# Altium PCB IO_Combo_V1_2PCB.PcbDoc (part 3 of 3)
Units mil, origin at the board's own origin, x right, y up, seen from the top; angles counter-clockwise.
Board outline 5600 x 4000 mil, 4 copper layers (Top Layer, Plane_Gnd, Plane_Power, Bottom Layer), stack 23.756 mil thick; 126 components, 208 nets, 710 pads, 196 vias.
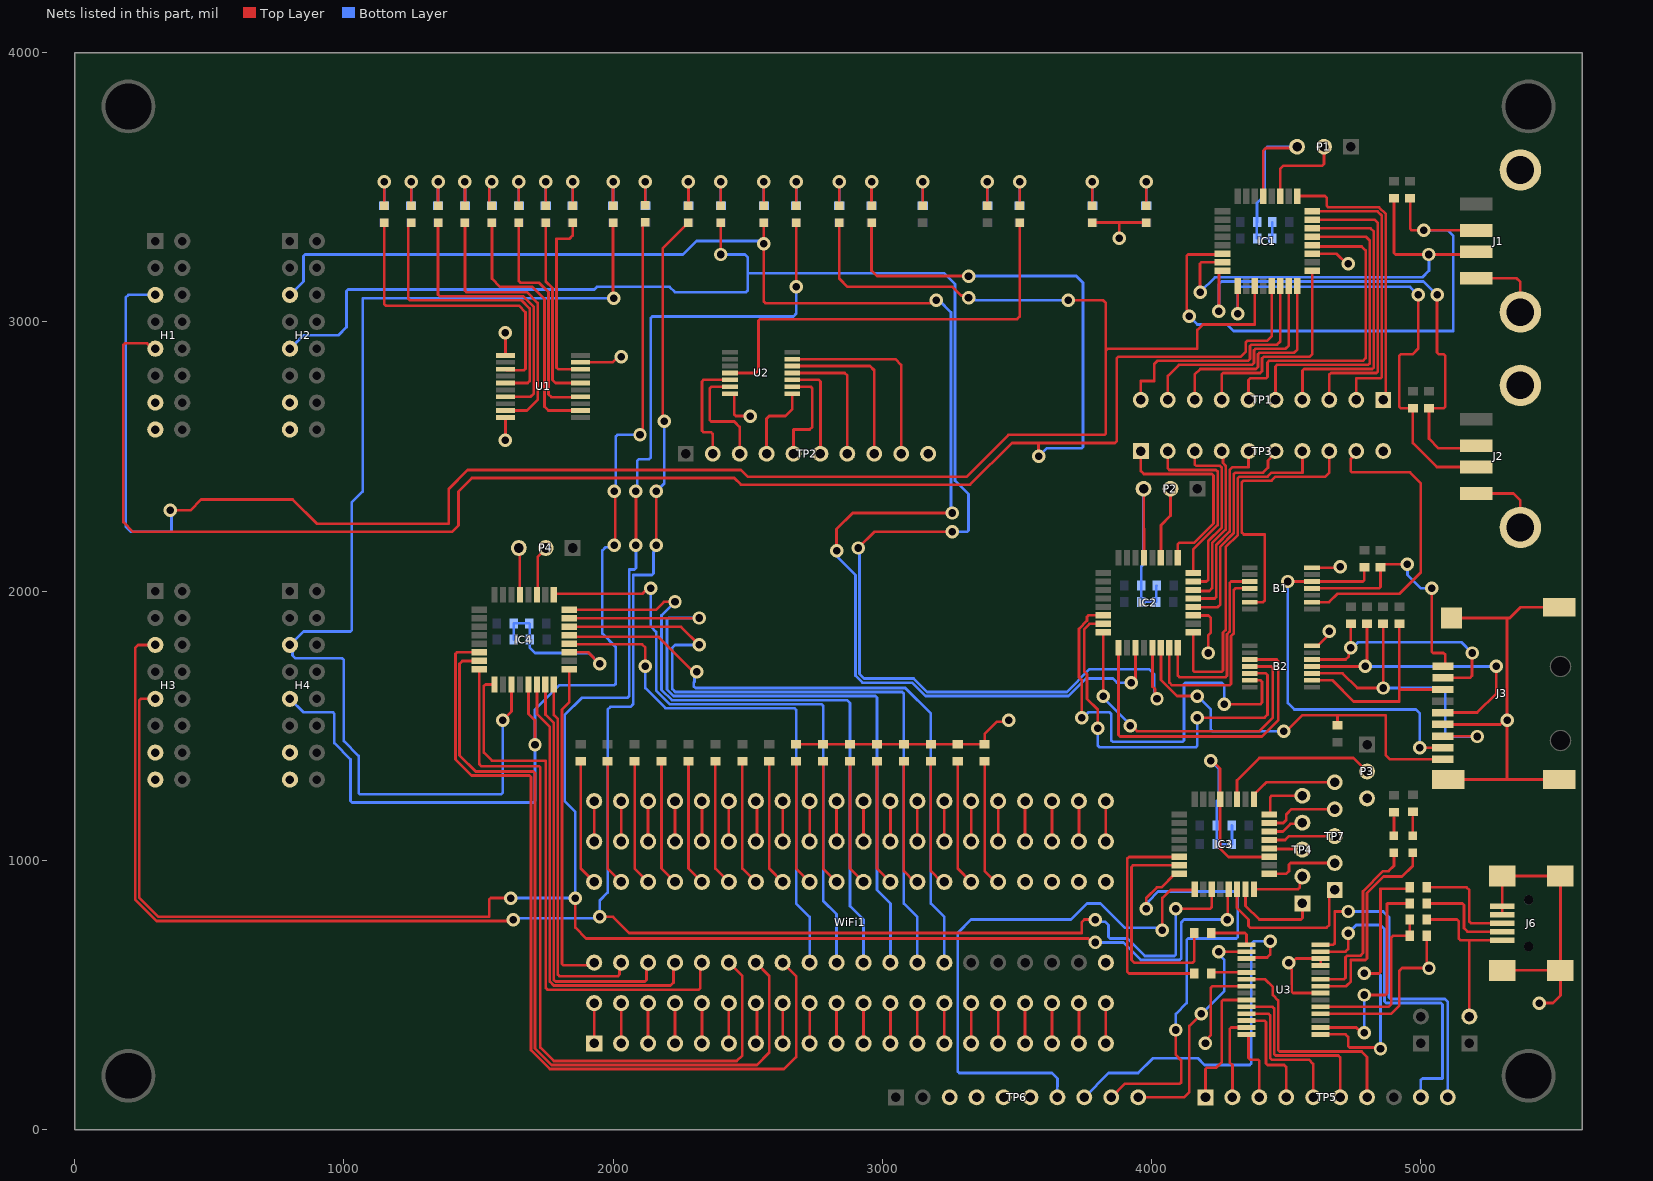
[diagram p4: the nets of this part, all layers, seen from the top]

## Via types
v1: diameter 50, hole 28, Top Layer to Bottom Layer, 196 vias

## Nets (pads, with @x,y where several pads share a name; then routed paths per layer and width w, separated by ;. In a path a pad name is that pad's centre, name@x,y a point inside that pad or via, vN(x,y) a via of type N, cw(c..) or ccw(c..) an arc to the next point about the centre after c; other vN are vias at no path point) (continued)
GND: B1.7 B2.7 C1.2 C2.2 C3.2 C4.2 C5.2 C6.2 C7.2 C8.2 C9.2 C10.2 C11.2 C12.2 C13.2 C14.2 C15.2 C16.2 H1.13 H1.15 H2.13 H2.15 H3.13 H3.15 H4.13 H4.15 IC1.19 IC1.29 IC2.19 IC2.29 IC3.19 IC3.29 IC4.19 IC4.29 J1.4 J1.MH1 J1.MH4 J2.4 J2.MH1 J2.MH4 J3.6 J3.MP1 J3.MP2 J3.MP3 J3.MP4 J6.4 J6.5 J6.6 J6.7 J6.8 J6.9 LED10.1 LED11.1 P1.3 P2.3 P3.3 P4.3 R40.1 R49.2 R50.2 R51.2 R52.2 R53.2 R54.2 R55.2 R56.2 TP2.10 TP3.10 TP6.3 TP6.4 TP6.5 TP6.6 U1.1 U1.10 U1.19 U2.7 U3.7 U3.18 U3.21 U3.25 U3.26 WiFi1.61 WiFi1.81 WiFi1.82 WiFi1.83 WiFi1.84 | length 10429.7
  Top Layer w10: v1(1600,2560) 1600.24,2560.24 U1.10@1600.24,2644.84 ; v1(1600,2960) 1600.24,2959.76 U1.1@1600.24,2875.16 ; P4.3@1653.13,2153.2 1653.13,1987.97 IC4.29@1654.25,1986.85 ; IC4.19@1836.85,1772.76 1907.24,1772.76 v1(1950,1730) ; U1.19@1879.76,2849.57 1880.2,2850 1999.18,2850 2019.18,2870 v1(2030,2870) ; U2.7@2434.33,2733.23 2446.14,2733.23 2450,2729.37 2450,2655.86 2455.86,2650 v1(2510,2650) ; R56.2@2680,1431.5 R55.2@2780,1431.5 R54.2@2880,1431.5 R53.2@2980,1431.5 R52.2@3080,1431.5 R51.2@3180,1431.5 R50.2@3280,1431.5 R49.2@3380,1431.5 3380,1470 3425,1515 3465,1515 v1(3470,1520) ; LED11.1@3780,3368.5 3880,3368.5 ; v1(3880,3310) 3880,3368.5 ; P2.3@3970,2380 3970.75,2379.25 3970.75,2124.45 IC2.29@3971.5,2123.7 3971.5,2231.5 ; LED10.1@3980,3368.5 3880,3368.5 ; IC2.19@4154.09,1909.61 4210.39,1909.61 4220,1900 4220,1845.41 4210,1835.41 v1(4210,1770) ; v1(4200,320) 4200,330.82 4220,350.82 4220,526.94 4225.86,532.8 U3.7@4352.2,532.8 ; v1(4220,1370) 4224.86,1370 4254.25,1340.61 IC3.29@4254.25,1236.85 ; IC3.29@4250,1236.85 IC3.29@4257.13,1229.72 ; IC3.29@4254.25,1226.85 4254.25,1044.25 4254.14,1044.14 4285.53,1012.76 IC3.19@4436.85,1012.76 ; IC1.29@4414.25,3466.85 4414.25,3634.25 4425.59,3645.59 4524.24,3645.59 P1.3@4528.65,3650 ; B2.7@4595.67,1796.77 4615.85,1796.77 4660,1840.93 v1(4660,1850) ; B1.7@4595.67,2086.77 4696.77,2086.77 v1(4700,2090) ; IC1.19@4596.85,3252.76 4687.24,3252.76 4725,3215 v1(4730,3215) ; U3.18@4627.8,430.43 4890,430.43 4920,460.43 4920,590 4929.96,599.96 v1(5030.04,599.96) 5021.5,608.5 R40.1@5021.5,720 ; U3.21@4627.8,507.2 4525.86,507.2 4520,513.06 4520,594.14 4517.65,596.49 4517.65,612.35 v1(4510,620) 4520.82,620 4535.98,635.16 U3.26@4627.8,635.16 U3.25@4627.8,609.57 ; J3.6@5081.52,1504.7 5294.14,1504.7 5301.66,1512.21 5317.79,1512.21 v1@5320,1510 ; J3.MP2@5101.2,1300 5320,1300 ; J3.MP1@5113.48,1900 5320,1900 ; J2.4@5205,2362.2 5344.14,2362.2 5369.29,2337.06 J2.MH4@5369.29,2236.22 ; J1.4@5205,3162.2 5354.14,3162.2 5369.29,3147.06 J1.MH4@5369.29,3036.22 ; J6.9@5301.57,591.42 J6.8@5518.11,591.42 ; J6.4@5301.57,798.11 J6.5@5301.57,829.61 J6.6@5301.57,941.81 J6.7@5518.11,941.81 J6.8@5518.11,591.42 ; v1(5440,470) 5490,470 5518.11,498.11 J6.8@5518.11,591.42 ; J3.MP4@5513.48,1300 5320,1300 ; J3.MP3@5513.48,1940 5370,1940 5330,1900 5320,1900 ; 5320,1300 v1@5320,1510 ; v1@5320,1510 5320,1900
  Bottom Layer w10: C13.2@1631.5,1820 C15.2@1631.5,1880 C16.2@1688.5,1880 1690,1878.5 1690,1790 1710,1770 1910,1770 v1(1950,1730) ; P2.3@3970,2380 3970,2100 3961.5,2091.5 C8.2@3961.5,2020 C5.2@3961.5,1960 C7.2@4017.01,1960 4017.01,2018.5 C6.2@4018.5,2020 ; v1(4220,1370) 4250,1340 4250,1228.5 4241.5,1220 C12.2@4241.5,1130 C9.2@4241.5,1060 C10.2@4298.5,1060 4298.5,1128.5 C11.2@4297.01,1130 ; C1.2@4390,3370 4390,3311.5 C4.2@4391.5,3310 C2.2@4448.5,3310 C3.2@4448.5,3370 ; C1.2@4391.5,3370 4391.5,3441.5 4420,3470 4420,3640 4430,3650 P1.3@4540,3650
  other v1: 5320,1520
Key_Clock: IC1.9 J2.3 R4.2 | length 1806.6
  Top Layer w10: IC1.9@4319.76,3133.15 4319.88,3133.03 4319.88,3030.12 v1(4320,3030) ; v1(4990,3100) 4990,2900 4970,2880 4925.86,2880 4920,2874.14 4920,2684.36 4925.86,2678.5 R4.2@4970,2678.5 4970,2550 5059.37,2460.63 J2.3@5205,2460.63 J2.3@5205.63,2460
  Bottom Layer w10: v1(4320,3030) 4320,3124.14 4325.86,3130 4960,3130 v1(4990,3100)
Key_Data: IC1.8 J2.2 R3.2 | length 1914.6
  Top Layer w10: v1(4250,3040) 4250,3182.95 4256.81,3189.76 IC1.8@4263.15,3189.76 ; v1(5060,3100) 5060,2885.86 5065.86,2880 5084.14,2880 5090,2874.14 5090,2684.36 5084.14,2678.5 R3.2@5030,2678.5 5030,2565.86 5065.86,2530 5195.63,2530 J2.2@5205,2539.37 J2.2@5214.37,2530
  Bottom Layer w10: v1(4250,3040) 4250,3140 4260,3150 5010,3150 v1(5060,3100)
KM_CPU_CS: H1.9 IC1.13 LED6.1 | length 7671.5
  Top Layer w10: H1.9@300,2900 289.14,2900 269.14,2920 187.23,2920 181.37,2914.14 181.37,2255.86 217.23,2220 1402.43,2220 1425.61,2243.18 1425.61,2370 1475.61,2420 2450,2420 2475,2395 3326.21,2395 3481.21,2550 3580,2550 ; LED6.1@2960,3368.5 2960,3190 2980,3170 v1(3320,3170) ; v1(3580,2500) 3580,2550 ; IC1.13@4445.75,3133.15 4445.75,2945.86 4429.89,2930 4355.86,2930 4350,2924.14 4350,2890 4330,2870 3875.86,2870 3870,2864.14 3870,2555.86 3864.14,2550 3580,2550
  Bottom Layer w10: v1(3320,3170) 3720,3170 3745,3145 3745,2535.86 3739.14,2530 3610,2530 v1(3580,2500)
KM_CPU_nInt: H1.5 IC1.11 LED4.1 | length 7482.4
  Top Layer w10: v1(355,2300) 430,2300 470,2340 810,2340 900,2250 1390,2250 1390,2380 1460,2450 2475,2450 2500,2425 3313.79,2425 3468.79,2580 3824.14,2580 3830,2585.86 3830,2894.14 ; LED4.1@2840,3368.5 2840,3160 2870,3130 3260,3130 3292.35,3097.65 3312.35,3097.65 v1(3320,3090) ; v1(3690,3080) 3820,3080 3830,3070 3830,2894.14 ; IC1.11@4382.76,3133.15 4382.76,2990 4190,2990 4170,2970 4170,2900 3835.86,2900 3830,2894.14
  Bottom Layer w10: H1.5@300,3100 200,3100 190,3090 190,2240 210,2220 354.14,2220 360,2225.86 360,2295 v1(355,2300) ; v1(3320,3090) 3327.65,3082.35 3343.51,3082.35 3345.86,3080 v1(3690,3080)
Mouse_Clock: IC1.7 J1.3 R2.2 | length 1648.6
  Top Layer w10: v1(4180,3110) 4180,3215.4 4185.86,3221.26 IC1.7@4263.15,3221.26 ; R2.2@4900,3458.5 4900,3255.86 4905.86,3250 5194.37,3250 J1.3@5205,3260.63
  Bottom Layer w10: v1(4180,3110) 4235,3165 5005,3165 5030,3190 v1(5030,3250)
Mouse_Data: IC1.6 J1.2 R1.2 | length 2201.1
  Top Layer w10: v1(4140,3020) 4132.35,3027.65 4132.35,3043.51 4130,3045.86 4130,3244.14 4135.86,3250 4260.39,3250 IC1.6@4263.15,3252.76 ; R1.2@4960,3458.5 4960,3345.86 4965.86,3340 v1(5010,3340) 5204.37,3340 J1.2@5205,3339.37 J1.2@5205.63,3340
  Bottom Layer w10: v1(4140,3020) 4170,2990 4280,2990 4304.14,2965.86 5120,2965.86 5120,3320 5100,3340 v1(5010,3340)
NetB1_4: B1.4 J3.1 R27.2 | length 910.2
  Top Layer w10: B1.4@4595.67,2010 4844.14,2010 4850,2015.86 R27.2@4850,2088.5 4860.75,2099.25 4949.25,2099.25 v1(4950,2100) ; v1@5040,2000 5040,1775.86 5045.86,1770 5084.14,1770 5090,1764.14 5090,1729.42 J3.1@5081.81,1721.24
  Bottom Layer w10: v1(4950,2100) 4950,2060 5000,2010 v1(5040,2010)
NetB1_5: B1.5 J3.8 R26.2 | length 1512.7
  Top Layer w10: v1(4505.86,2035.59) B1.5@4595.67,2035.59 4784.14,2035.59 4790,2041.45 R26.2@4790,2088.5 ; v1@4990,1423.94 v1(4995.86,1418.08) J3.8@5081.52,1418.08
  Bottom Layer w10: v1(4505.86,2035.59) 4505.86,1584.14 4530,1560 4981.72,1560 4995.86,1545.86 v1(4995.86,1418.08)
NetB2_2: B2.2 J3.3 R28.2 | length 809.4
  Top Layer w10: B2.2@4595.67,1668.82 4671.18,1668.82 4750,1590 4920,1590 4920,1640.48 ; R28.2@4920,1878.5 4920,1640.48 ; J3.3@5081.52,1634.62 4925.86,1634.62 4920,1640.48
NetB2_3: B2.3 J3.7 R29.2 | length 1177.6
  Top Layer w10: B2.3@4595.67,1694.41 4709.47,1694.41 4763.88,1640 v1(4860,1640) R29.2@4860,1878.5 ; J3.7@5081.52,1461.39 5082.21,1460.69 5209.31,1460.69 v1(5210,1460)
  Bottom Layer w10: v1(4860,1640) 5084.14,1640 5090,1634.14 5090,1465.86 5095.86,1460 v1(5210,1460)
NetB2_4: B2.4 J3.5 R30.2 | length 1173.6
  Top Layer w10: B2.4@4595.67,1720 v1(4794.14,1720) 4800,1725.86 R30.2@4800,1878.5 ; J3.5@5081.52,1548 5082.51,1549 5209,1549 5280,1620 v1(5280,1720)
  Bottom Layer w10: v1(4794.14,1720) v1(5280,1720)
NetB2_5: B2.5 J3.2 R31.2 | length 936.4
  Top Layer w10: B2.5@4595.67,1745.59 4720.77,1745.59 4732.35,1757.17 4732.35,1782.35 v1(4740,1790) R31.2@4740,1878.5 ; J3.2@5081.81,1677.93 5182.07,1677.93 5190,1685.86 v1(5190,1770)
  Bottom Layer w10: v1(4740,1790) 4745.86,1790 4765.86,1810 5150,1810 v1(5190,1770)
NetJ5_2: J5.2 J6.1 R37.2 | length 632.9
  Top Layer w10: R37.2@5021.5,780 5134.14,780 5140,774.14 5140,710 5146.38,703.62 5180,703.62 ; J5.2@5180,420 5180,703.62 ; J6.1@5301.57,703.62 5180,703.62
NetLED1_2: LED1.2 R5.1 | length 177
  Top Layer w10: LED1.2@2000,3431.5 v1(2000,3520)
  Bottom Layer w10: R5.1@2000,3431.5 v1(2000,3520)
NetLED2_2: LED2.2 R6.1 | length 177
  Top Layer w10: LED2.2@2280,3431.5 v1(2280,3520)
  Bottom Layer w10: R6.1@2280,3431.5 v1(2280,3520)
NetLED3_2: LED3.2 R7.1 | length 177
  Top Layer w10: LED3.2@2560,3431.5 v1(2560,3520)
  Bottom Layer w10: R7.1@2560,3431.5 v1(2560,3520)
NetLED4_2: LED4.2 R8.1 | length 177
  Top Layer w10: LED4.2@2840,3431.5 v1(2840,3520)
  Bottom Layer w10: R8.1@2840,3431.5 v1(2840,3520)
NetLED5_2: LED5.2 R9.1 | length 177
  Top Layer w10: LED5.2@3150,3431.5 v1(3150,3520)
  Bottom Layer w10: R9.1@3150,3431.5 v1(3150,3520)
NetLED6_2: LED6.2 R10.1 | length 177
  Top Layer w10: LED6.2@2960,3431.5 v1(2960,3520)
  Bottom Layer w10: R10.1@2960,3431.5 v1(2960,3520)
NetLED7_2: LED7.2 R11.1 | length 175.5
  Top Layer w10: LED7.2@2120,3432.99 v1(2120,3520)
  Bottom Layer w10: R11.1@2120,3431.5 v1(2120,3520)
NetLED8_2: LED8.2 R12.1 | length 177
  Top Layer w10: LED8.2@2680,3431.5 v1(2680,3520)
  Bottom Layer w10: R12.1@2680,3431.5 v1(2680,3520)
NetLED9_2: LED9.2 R13.1 | length 177
  Top Layer w10: LED9.2@2400,3431.5 v1(2400,3520)
  Bottom Layer w10: R13.1@2400,3431.5 v1(2400,3520)
NetLED10_2: LED10.2 R14.1 | length 177
  Top Layer w10: LED10.2@3980,3431.5 v1(3980,3520)
  Bottom Layer w10: R14.1@3980,3431.5 v1(3980,3520)
NetLED11_2: LED11.2 R15.1 | length 177
  Top Layer w10: LED11.2@3780,3431.5 v1(3780,3520)
  Bottom Layer w10: R15.1@3780,3431.5 v1(3780,3520)
NetLED12_1: LED12.1 U1.18 | length 684.1
  Top Layer w10: LED12.1@1850,3368.5 1850,3320 1838.5,3308.5 1790,3308.5 1790,2829.83 1795.86,2823.98 U1.18@1879.76,2823.98
NetLED12_2: LED12.2 R16.1 | length 157
  Top Layer w10: LED12.2@1850,3431.5 v1@1850,3510
  Bottom Layer w10: R16.1@1850,3431.5 v1@1850,3510
  other v1: 1850,3520
NetLED13_1: LED13.1 U1.16 | length 704.5
  Top Layer w10: LED13.1@1750,3368.5 1750,3150 1775,3125 1775,2783.65 1785.86,2772.8 U1.16@1879.76,2772.8
NetLED13_2: LED13.2 R17.1 | length 177
  Top Layer w10: LED13.2@1750,3431.5 v1(1750,3520)
  Bottom Layer w10: R17.1@1750,3431.5 v1(1750,3520)
NetLED14_1: LED14.1 U1.14 | length 848.6
  Top Layer w10: LED14.1@1650,3368.5 1650,3150.86 1655.86,3145 1725,3145 1760,3110 1760,2730.86 1770.86,2720 1878.15,2720 U1.14@1879.76,2721.61
NetLED14_2: LED14.2 R18.1 | length 177
  Top Layer w10: LED14.2@1650,3431.5 v1(1650,3520)
  Bottom Layer w10: R18.1@1650,3431.5 v1(1650,3520)
NetLED15_1: LED15.1 U1.12 | length 975.4
  Top Layer w10: LED15.1@1550,3368.5 1550,3160 1580,3130 1700,3130 1745,3085 1745,2685 1759.57,2670.43 U1.12@1879.76,2670.43
NetLED15_2: LED15.2 R19.1 | length 185.3
  Top Layer w10: v1@1540,3520 1540,3441.5 LED15.2@1550,3431.5
  Bottom Layer w10: v1@1540,3520 1540,3441.5 R19.1@1550,3431.5
  other v1: 1550,3520
NetLED16_1: LED16.1 U1.9 | length 1037.8
  Top Layer w10: LED16.1@1450,3368.5 1450,3115.86 1455.86,3110 1680,3110 1720,3070 1720,2710 1680.43,2670.43 U1.9@1600.24,2670.43
NetLED16_2: LED16.2 R20.1 | length 177
  Top Layer w10: LED16.2@1450,3431.5 v1(1450,3520)
  Bottom Layer w10: R20.1@1450,3431.5 v1(1450,3520)
NetLED17_1: LED17.1 U1.7 | length 1074.1
  Top Layer w10: LED17.1@1350,3368.5 1350,3100.86 1355.86,3095 1666.21,3095 1705,3056.21 1705,2732.47 1694.14,2721.61 U1.7@1600.24,2721.61
NetLED17_2: LED17.2 R21.1 | length 177
  Top Layer w10: LED17.2@1350,3431.5 v1(1350,3520)
  Bottom Layer w10: R21.1@1350,3431.5 v1(1350,3520)
NetLED18_1: LED18.1 U1.5 | length 1115.4
  Top Layer w10: LED18.1@1250,3368.5 1239.25,3357.76 1239.25,3085.86 1245.11,3080 1660,3080 1690,3050 1690,2780 1682.8,2772.8 U1.5@1600.24,2772.8
NetLED18_2: LED18.2 R22.1 | length 177
  Top Layer w10: LED18.2@1250,3431.5 v1(1250,3520)
  Bottom Layer w10: R22.1@1250,3431.5 v1(1250,3520)
NetLED19_1: LED19.1 U1.3 | length 1128.4
  Top Layer w10: LED19.1@1150,3368.5 1150,3065.86 1155.86,3060 1650,3060 1675,3035 1675,2825.86 1669.14,2820 1650.79,2820 1650.67,2820.12 1604.09,2820.12 U1.3@1600.24,2823.98
NetLED19_2: LED19.2 R23.1 | length 177
  Top Layer w10: LED19.2@1150,3431.5 v1(1150,3520)
  Bottom Layer w10: R23.1@1150,3431.5 v1(1150,3520)
NetLED20_2: LED20.2 R24.1 | length 177
  Top Layer w10: LED20.2@3390,3431.5 v1(3390,3520)
  Bottom Layer w10: R24.1@3390,3431.5 v1(3390,3520)
NetLED21_1: LED21.1 U2.4 | length 1619
  Top Layer w10: U2.4@2434.33,2810 2530,2810 2540,2820 2540,3004.14 2545.86,3010 3500,3010 3510,3020 LED21.1@3510,3368.5
NetLED21_2: LED21.2 R25.1 | length 177
  Top Layer w10: LED21.2@3510,3431.5 v1(3510,3520)
  Bottom Layer w10: R25.1@3510,3431.5 v1(3510,3520)
NetLED22_1: LED22.1 U3.23 | length 673.9
  Top Layer w10: U3.23@4627.8,558.39 4714.14,558.39 4720,564.24 4720,639.89 4725.86,645.75 4774.89,645.75 4785,655.86 4785,885 4860,960 4880,960 4900,980 LED22.1@4900,1028.5
NetLED22_2: LED22.2 R33.1 | length 67
  Top Layer w10: LED22.2@4900,1091.5 4900,1158.5
NetLED23_1: LED23.1 U3.22 | length 765.1
  Top Layer w10: U3.22@4627.8,532.8 4722.8,532.8 4740,550 4740,630 4794.14,630 4800,635.86 4800,878.79 4861.21,940 4930,940 4970,980 LED23.1@4970,1028.5
NetLED23_2: LED23.2 R34.1 | length 68.5
  Top Layer w10: LED23.2@4970,1091.5 4970,1160
NetR35_2: R35.2 U3.1 | length 170.9
  Top Layer w10: R35.2@4221.5,730 4346.35,730 4352.2,724.14 U3.1@4352.2,686.34
NetR36_2: R36.2 U3.5 | length 133.2
  Top Layer w10: R36.2@4221.5,590 4227.52,583.98 U3.5@4352.2,583.98
NetR37_1: R37.1 R40.2 U3.19 | length 645.5
  Top Layer w10: U3.19@4627.8,456.02 4880.17,456.02 4890,465.86 4890,714.14 4895.86,720 R40.2@4958.5,720 R37.1@4958.5,780
NetR38_2: R38.2 U3.16 | length 814.2
  Top Layer w10: U3.16@4627.8,379.25 4759.92,379.25 4779.18,360 v1(4790,360) ; v1(4790,500) 4868.28,500 4874.14,505.86 4874.14,838.28 4875.86,840 R38.2@4958.5,840
  Bottom Layer w10: v1(4790,360) v1(4790,500)
NetR39_2: R39.2 U3.15 | length 1082.1
  Top Layer w10: U3.15@4627.8,353.66 4720.48,353.66 4730,344.14 4730,310.86 4735.86,305 4845,305 v1(4850,300) ; v1(4790,580) 4844.14,580 4850,585.86 4850,894.14 4952.65,894.14 R39.2@4958.5,900
  Bottom Layer w10: v1(4790,580) 4844.14,580 4850,574.14 v1(4850,300)
NetR41_2: R41.2 WiFi1.100 | length 469.2
  Top Layer w10: R41.2@1880,1368.5 1880,970 WiFi1.100@1930,920
NetR42_2: R42.2 WiFi1.99 | length 469.2
  Top Layer w10: R42.2@1980,1368.5 1980,970 WiFi1.99@2030,920
NetR43_2: R43.2 WiFi1.98 | length 469.2
  Top Layer w10: R43.2@2080,1368.5 2080,970 WiFi1.98@2130,920
NetR44_2: R44.2 WiFi1.97 | length 469.2
  Top Layer w10: R44.2@2180,1368.5 2180,970 WiFi1.97@2230,920
NetR45_2: R45.2 WiFi1.96 | length 469.2
  Top Layer w10: R45.2@2280,1368.5 2280,970 WiFi1.96@2330,920
NetR46_2: R46.2 WiFi1.95 | length 469.2
  Top Layer w10: R46.2@2380,1368.5 2380,970 WiFi1.95@2430,920
NetR47_2: R47.2 WiFi1.94 | length 469.2
  Top Layer w10: R47.2@2480,1368.5 2480,970 WiFi1.94@2530,920
NetR48_2: R48.2 WiFi1.93 | length 469.2
  Top Layer w10: R48.2@2580,1368.5 2580,970 WiFi1.93@2630,920
NetR49_1: R49.1 WiFi1.85 | length 476.6
  Top Layer w10: R49.1@3380,1370 3380,960 3420,920 WiFi1.85@3430,920
NetR50_1: R50.1 WiFi1.86 | length 469.2
  Top Layer w10: R50.1@3280,1368.5 3280,970 WiFi1.86@3330,920
NetR51_1: R51.1 WiFi1.87 | length 475.1
  Top Layer w10: R51.1@3180,1368.5 3180,960 3220,920 WiFi1.87@3230,920
NetR52_1: R52.1 WiFi1.88 | length 475.1
  Top Layer w10: R52.1@3080,1368.5 3080,960 3120,920 WiFi1.88@3130,920
NetR53_1: R53.1 WiFi1.89 | length 469.2
  Top Layer w10: R53.1@2980,1368.5 2980,970 WiFi1.89@3030,920
NetR54_1: R54.1 WiFi1.90 | length 469.2
  Top Layer w10: R54.1@2880,1368.5 2880,970 WiFi1.90@2930,920
NetR55_1: R55.1 WiFi1.91 | length 469.2
  Top Layer w10: R55.1@2780,1368.5 2780,970 WiFi1.91@2830,920
NetR56_1: R56.1 WiFi1.92 | length 469.2
  Top Layer w10: R56.1@2680,1368.5 2680,970 WiFi1.92@2730,920
NetWiFi1_1: WiFi1.1 WiFi1.41 | length 150
  Top Layer w10: WiFi1.1@1930,320 WiFi1.41@1930,470
NetWiFi1_2: WiFi1.2 WiFi1.42 | length 150
  Top Layer w10: WiFi1.2@2030,320 WiFi1.42@2030,470
NetWiFi1_3: WiFi1.3 WiFi1.43 | length 150
  Top Layer w10: WiFi1.3@2130,320 WiFi1.43@2130,470
NetWiFi1_4: WiFi1.4 WiFi1.44 | length 150
  Top Layer w10: WiFi1.4@2230,320 WiFi1.44@2230,470
NetWiFi1_5: WiFi1.5 WiFi1.45 | length 150
  Top Layer w10: WiFi1.5@2330,320 WiFi1.45@2330,470
NetWiFi1_6: WiFi1.6 WiFi1.46 | length 150
  Top Layer w10: WiFi1.6@2430,320 WiFi1.46@2430,470
NetWiFi1_7: WiFi1.7 WiFi1.47 | length 153.4
  Top Layer w10: WiFi1.7@2530,320 2534.16,324.16 2534.16,465.84 WiFi1.47@2538.31,470
NetWiFi1_8: WiFi1.8 WiFi1.48 | length 150
  Top Layer w10: WiFi1.8@2630,320 WiFi1.48@2630,470
NetWiFi1_9: WiFi1.9 WiFi1.49 | length 150
  Top Layer w10: WiFi1.9@2730,320 WiFi1.49@2730,470
NetWiFi1_10: WiFi1.10 WiFi1.50 | length 150
  Top Layer w10: WiFi1.10@2830,320 WiFi1.50@2830,470
NetWiFi1_11: WiFi1.11 WiFi1.51 | length 150
  Top Layer w10: WiFi1.11@2930,320 WiFi1.51@2930,470
NetWiFi1_12: WiFi1.12 WiFi1.52 | length 150
  Top Layer w10: WiFi1.12@3030,320 WiFi1.52@3030,470
NetWiFi1_13: WiFi1.13 WiFi1.53 | length 150
  Top Layer w10: WiFi1.13@3130,320 WiFi1.53@3130,470
NetWiFi1_14: WiFi1.14 WiFi1.54 | length 150
  Top Layer w10: WiFi1.14@3230,320 WiFi1.54@3230,470
NetWiFi1_15: WiFi1.15 WiFi1.55 | length 150
  Top Layer w10: WiFi1.15@3330,320 WiFi1.55@3330,470
NetWiFi1_16: WiFi1.16 WiFi1.56 | length 150
  Top Layer w10: WiFi1.16@3430,320 WiFi1.56@3430,470
NetWiFi1_17: WiFi1.17 WiFi1.57 | length 150
  Top Layer w10: WiFi1.17@3530,320 WiFi1.57@3530,470
NetWiFi1_18: WiFi1.18 WiFi1.58 | length 150
  Top Layer w10: WiFi1.18@3630,320 WiFi1.58@3630,470
NetWiFi1_19: WiFi1.19 WiFi1.59 | length 150
  Top Layer w10: WiFi1.19@3730,320 WiFi1.59@3730,470
NetWiFi1_20: WiFi1.20 WiFi1.60 | length 150
  Top Layer w10: WiFi1.20@3830,320 WiFi1.60@3830,470
NetWiFi1_21: WiFi1.21 WiFi1.101 | length 150
  Top Layer w10: WiFi1.101@3830,1070 WiFi1.21@3830,1220
NetWiFi1_22: WiFi1.22 WiFi1.102 | length 150
  Top Layer w10: WiFi1.102@3730,1070 WiFi1.22@3730,1220
NetWiFi1_23: WiFi1.23 WiFi1.103 | length 150
  Top Layer w10: WiFi1.103@3630,1070 WiFi1.23@3630,1220
NetWiFi1_24: WiFi1.24 WiFi1.104 | length 150
  Top Layer w10: WiFi1.104@3530,1070 WiFi1.24@3530,1220
NetWiFi1_25: WiFi1.25 WiFi1.105 | length 150
  Top Layer w10: WiFi1.105@3430,1070 WiFi1.25@3430,1220
NetWiFi1_26: WiFi1.26 WiFi1.106 | length 150
  Top Layer w10: WiFi1.106@3330,1070 WiFi1.26@3330,1220
NetWiFi1_27: WiFi1.27 WiFi1.107 | length 150
  Top Layer w10: WiFi1.107@3230,1070 WiFi1.27@3230,1220
NetWiFi1_28: WiFi1.28 WiFi1.108 | length 150
  Top Layer w10: WiFi1.108@3130,1070 WiFi1.28@3130,1220
NetWiFi1_29: WiFi1.29 WiFi1.109 | length 150
  Top Layer w10: WiFi1.109@3030,1070 WiFi1.29@3030,1220
NetWiFi1_30: WiFi1.30 WiFi1.110 | length 150
  Top Layer w10: WiFi1.110@2930,1070 WiFi1.30@2930,1220
NetWiFi1_31: WiFi1.31 WiFi1.111 | length 150
  Top Layer w10: WiFi1.111@2830,1070 WiFi1.31@2830,1220
NetWiFi1_32: WiFi1.32 WiFi1.112 | length 150
  Top Layer w10: WiFi1.112@2730,1070 WiFi1.32@2730,1220
NetWiFi1_33: WiFi1.33 WiFi1.113 | length 150
  Top Layer w10: WiFi1.113@2630,1070 WiFi1.33@2630,1220
NetWiFi1_34: WiFi1.34 WiFi1.114 | length 153.4
  Top Layer w10: WiFi1.34@2530,1220 2534.16,1215.84 2534.16,1074.16 WiFi1.114@2538.31,1070
NetWiFi1_35: WiFi1.35 WiFi1.115 | length 150
  Top Layer w10: WiFi1.115@2430,1070 WiFi1.35@2430,1220
NetWiFi1_36: WiFi1.36 WiFi1.116 | length 150
  Top Layer w10: WiFi1.116@2330,1070 WiFi1.36@2330,1220
NetWiFi1_37: WiFi1.37 WiFi1.117 | length 150
  Top Layer w10: WiFi1.117@2230,1070 WiFi1.37@2230,1220
NetWiFi1_38: WiFi1.38 WiFi1.118 | length 150
  Top Layer w10: WiFi1.118@2130,1070 WiFi1.38@2130,1220
NetWiFi1_39: WiFi1.39 WiFi1.119 | length 150
  Top Layer w10: WiFi1.119@2030,1070 WiFi1.39@2030,1220
NetWiFi1_40: WiFi1.40 WiFi1.120 | length 150
  Top Layer w10: WiFi1.120@1930,1070 WiFi1.40@1930,1220
pCLK_SCLK: B2.11 IC2.8 | length 1219.4
  Top Layer w10: v1(3820,1610) 3820,1846.22 IC2.8@3820.39,1846.61 ; v1(3920,1500) 3925.86,1500 3945.86,1480 4400,1480 4450,1530 4450,1714.14 4444.14,1720 B2.11@4364.33,1720
  Bottom Layer w10: v1(3820,1610) 3820,1605 3920,1505 v1(3920,1500)
pCMD_MOSI: B2.13 IC2.6 | length 1650
  Top Layer w10: v1(3740,1530) 3740,1670 3730,1680 3730,1860 3760,1890 3760,1904.14 3765.86,1910 3820,1910 IC2.6@3820.39,1909.61 ; v1(4270,1580) 4404.14,1580 4410,1585.86 4410,1662.96 4404.14,1668.82 B2.13@4364.33,1668.82
  Bottom Layer w10: v1(3740,1530) 3745.86,1530 3765.86,1550 3844.14,1550 3850,1544.14 3850,1445.86 3855.86,1440 4114.14,1440 4120,1445.86 4120,1654.14 4125.86,1660 4260,1660 4270,1650 v1(4270,1580)
pDAT0_MISO: B2.12 IC2.7 | length 1491.3
  Top Layer w10: v1(3800,1490) 3800,1560 3760,1600 3760,1691.46 3750,1701.46 3750,1858.79 3769.32,1878.11 IC2.7@3820.39,1878.11 ; v1(4170,1530) 4419.14,1530 4430,1540.86 4430,1688.55 4424.14,1694.41 B2.12@4364.33,1694.41
  Bottom Layer w10: v1(3800,1490) 3800,1425.86 3805.86,1420 4164.14,1420 4170,1425.86 v1(4170,1530)
pDAT3_CS: B2.10 IC2.9 | length 1272.2
  Top Layer w10: IC2.9@3877.01,1790 3877.01,1465.86 3882.87,1460 4410,1460 4470,1520 4470,1739.73 4464.14,1745.59 B2.10@4364.33,1745.59
pSD_DAT1: B1.10 IC2.16 | length 716.3
  Top Layer w10: IC2.16@4097.48,1790 4097.48,1685.86 4103.34,1680 4274.14,1680 4280,1685.86 4280,1839.29 4290,1849.29 4290,2029.73 4295.86,2035.59 B1.10@4364.33,2035.59
pSD_DAT2: B1.11 IC2.15 | length 779.9
  Top Layer w10: IC2.15@4065.98,1790 4065.98,1659.72 4075.7,1650 4289.14,1650 4295,1655.86 4295,1833.08 4305,1843.08 4305,2004.14 4310.86,2010 B1.11@4364.33,2010
RXD: IC3.7 R35.1 | length 870.2
  Top Layer w10: IC3.7@4103.15,981.26 3930.86,981.26 3925,975.4 3925,630 3935,620 4152.65,620 4158.5,625.86 R35.1@4158.5,730
SD_Card_Detect: IC2.14 J3.9 R32.1 | length 1507.3
  Top Layer w10: IC2.14@4034.49,1790 4034.49,1670 4094.49,1610 v1(4170,1610) ; v1(4490,1480) 4500.61,1480 4560,1539.39 4690,1539.39 ; R32.1@4690,1501.5 4690,1539.39 ; J3.9@5081.52,1375 4885,1375 4870,1390 4870,1539.39 4690,1539.39
  Bottom Layer w10: v1(4170,1610) 4220,1560 4220,1485.86 4225.86,1480 v1(4490,1480)
SD_CPU_CS: H2.9 IC2.13 LED9.1 | length 6317.5
  Top Layer w10: v1(2400,3250) LED9.1@2400,3368.5 ; v1(2910,2160) 2970,2220 v1(3260,2220) ; IC2.13@4002.99,1790 4002.99,1645 4012.35,1635.65 4012.35,1607.65 v1(4020,1600)
  Bottom Layer w10: H2.9@800,2900 850,2950 980,2950 1010,2980 1010,3114.14 1015.86,3120 1930,3120 1940,3130 2210,3130 2230,3110 2494.14,3110 2500,3115.86 2500,3180 ; v1(2400,3250) 2490,3250 2500,3240 2500,3180 ; v1(2910,2160) 2915,2155 2915,1692.07 2932.07,1675 3116.21,1675 3166.21,1625 3685,1625 3770,1710 3990,1710 4010,1690 4010,1625.86 4012.35,1623.51 4012.35,1607.65 v1(4020,1600) ; v1(3260,2220) 3314.14,2220 3320,2225.86 3320,2360 3270,2410 3270,3140 3230,3180 2500,3180
SD_CPU_nInt: H2.5 IC2.11 LED3.1 | length 5929.2
  Top Layer w10: LED3.1@2560,3368.5 v1(2560,3290) 2560,3075.03 2565.86,3069.18 3178.35,3069.18 3189.18,3080 v1(3200,3080) ; v1(2830,2150) 2830,2230 2890,2290 v1(3260,2290) ; v1@3930,1660 v1@3940,1650 ; v1@3940,1660 IC2.11@3940,1790
  Bottom Layer w10: H2.5@800,3100 850,3150 850,3244.14 855.86,3250 2260,3250 2310,3300 2560,3300 v1(2560,3290) ; v1(2830,2150) 2830,2130 2900,2060 2900,1685.86 2925.86,1660 3110,1660 3160,1610 3691.21,1610 3756.21,1675 3856.21,1675 3871.21,1660 v1@3923.43,1660 ; v1(3200,3080) 3210,3080 3255,3035 3255,2295 v1(3260,2290)
  other v1: 3925,1660
TP1: IC2.25 TP3.1 | length 743.9
  Top Layer w10: TP3.1@3960,2520 3960,2445.86 3970.86,2435 4224.14,2435 4230,2429.14 4230,2295 4230,2251.21 4158.79,2180 4103.34,2180 4097.48,2174.14 IC2.25@4097.48,2123.7
TP2: IC2.24 TP3.2 | length 668.7
  Top Layer w10: TP3.2@4060,2520 4060,2455.86 4065.86,2450 4239.14,2450 4245,2444.14 4245,2245 4154.09,2154.09 IC2.24@4154.09,2067.09
TP3: IC2.23 TP3.3 | length 650.7
  Top Layer w10: IC2.23@4154.09,2035.59 4204.14,2035.59 4210,2041.45 4210,2185 4260,2235 4260,2459.14 4254.14,2465 4165.86,2465 4160,2470.86 TP3.3@4160,2520
TP4: IC2.22 TP3.4 | length 613.2
  Top Layer w10: IC2.22@4154.09,2004.09 4158.19,2000 4214.14,2000 4225,2010.86 4225,2178.79 4275,2228.79 4275,2465.36 4264.88,2475.47 4264.88,2515.12 TP3.4@4260,2520
TP5: IC2.21 TP3.5 | length 714.7
  Top Layer w10: IC2.21@4154.09,1972.6 4234.14,1972.6 4240,1978.46 4240,2171.21 4290,2221.21 4290,2450 4300,2460 4360,2460 TP3.5@4360,2520
TP6: IC2.20 TP3.6 | length 820.4
  Top Layer w10: IC2.20@4154.09,1941.1 4155.2,1940 4244.14,1940 4255,1950.86 4255,2165 4305,2215 4305,2434.14 4310.86,2440 4414.14,2440 4432.38,2458.24 4432.38,2484.65 4460,2512.27 TP3.6@4460,2520
TP7: IC2.17 TP3.7 | length 1321.2
  Top Layer w10: IC2.17@4154.09,1846.61 4154.09,1705.86 4159.95,1700 4259.14,1700 4265,1705.86 4265,1845.5 4275,1855.5 4275,2163.79 4320,2208.79 4320,2419.14 4325.86,2425 4430,2425 4445,2440 4560,2440 TP3.7@4560,2520
TP8: B1.13 TP3.8 | length 998.1
  Top Layer w10: B1.13@4364.33,1958.82 4414.14,1958.82 4420,1964.68 4420,2210 4342.43,2210 4335,2217.43 4335,2404.14 4340.86,2410 4445,2410 4460,2425 4645,2425 4660,2440 TP3.8@4660,2520
TP9: B1.2 TP3.9 | length 1142.5
  Top Layer w10: B1.2@4595.67,1958.82 4658.82,1958.82 4690,1990 4920,1990 5000,2070 5000,2400 4959.19,2440.81 4745.04,2440.81 4739.19,2446.67 4739.19,2489.61 4760,2510.43 TP3.9@4760,2520
TP45: IC3.25 TP7.5 | length 336.2
  Top Layer w10: IC3.25@4380.24,1226.85 4380.24,1244.07 4420,1283.84 4420,1284.14 4425.86,1290 TP7.5@4680,1290
TP46: IC3.24 TP4.5 | length 187.6
  Top Layer w10: IC3.24@4436.85,1170.24 4440,1173.39 4440,1234.14 4445.86,1240 TP4.5@4560,1240
TP47: IC3.23 TP7.4 | length 276.1
  Top Layer w10: IC3.23@4436.85,1138.74 4488.74,1138.74 4500,1150 4500,1170 4520,1190 TP7.4@4680,1190
TP48: IC3.21 TP7.3 | length 249.1
  Top Layer w10: IC3.21@4436.85,1075.75 4495.75,1075.75 4510,1090 TP7.3@4680,1090
TP49: IC3.9 TP6.7 | length 2065.8
  Top Layer w10: v1(4040,740) 4040,860 4070,890 4156.61,890 IC3.9@4159.76,893.15
  Bottom Layer w10: TP6.7@3650,120 3650,160 3650.61,160.61 3650.61,189.39 3630,210 3285.86,210 3280,215.86 3280,730 3330,780 3700,780 3760,840 3810,840 3900,750 4014.14,750 4016.49,747.65 4032.35,747.65 v1(4040,740)
TP50: IC3.20 TP4.3 | length 124.9
  Top Layer w10: IC3.20@4436.85,1044.25 4438.98,1042.13 4557.87,1042.13 TP4.3@4560,1040
TP51: IC3.17 TP7.2 | length 274
  Top Layer w10: IC3.17@4436.85,949.76 4499.76,949.76 4510,960 4510,984.14 4515.86,990 TP7.2@4680,990
TP52: IC3.16 TP4.2 | length 217.3
  Top Layer w10: IC3.16@4380.24,893.15 4544.14,893.15 4550.61,899.62 4550.61,930.61 TP4.2@4560,940
TP53: IC3.15 TP4.1 | length 351
  Top Layer w10: IC3.15@4348.74,893.15 4348.74,831.26 4400,780 4554.14,780 4560,785.86 TP4.1@4560,840
TP54: IC3.14 TP7.1 | length 622.3
  Top Layer w10: IC3.14@4317.24,893.15 4317.24,822.76 4360,780 4360,755.86 4365.86,750 4650,750 4660,760 4660,870 TP7.1@4680,890 4665.86,890 TP7.1@4660,884.14
TP56: IC3.8 TP6.9 | length 1774.6
  Top Layer w10: TP6.9@3850,120 3900,170 4104.14,170 4110,175.86 4110,257.52 4090,277.52 v1(4090,370) ; v1(3980,820) 3980,860 4020,900 4036.16,900 4085.93,949.76 IC3.8@4103.15,949.76
  Bottom Layer w10: v1(3980,820) 3987.65,827.65 3987.65,847.65 4024.14,884.14 4314.14,884.14 4320,878.28 4320,715.86 4314.14,710 4135.86,710 4130,704.14 4130,470 4090,430 v1(4090,370)
TP57: TP5.3 U3.14 | length 272.3
  Top Layer w10: U3.14@4352.2,353.66 4356.14,353.66 4360,349.8 4360,265.86 4365.86,260 4394.14,260 4400,254.14 TP5.3@4400,120
TP58: TP5.5 U3.11 | length 542.1
  Top Layer w10: U3.11@4352.2,430.43 4434.14,430.43 4440,424.58 4440,265.86 4445.86,260 4584.14,260 4600,244.14 TP5.5@4600,120
TP59: TP5.4 U3.12 | length 421.1
  Top Layer w10: U3.12@4352.2,404.84 4419.14,404.84 4425,398.98 4425,245.86 4430.86,240 4492,240 4500,232 TP5.4@4500,120
TP60: TP5.7 U3.6 | length 842.7
  Top Layer w10: U3.6@4352.2,558.39 4421.61,558.39 4450,530 4450,500 4470,480 4470,295.86 4475.86,290 4780,290 4800,270 TP5.7@4800,120
TP62: TP5.1 U3.9 | length 495.2
  Top Layer w10: TP5.1@4200,120 4200,224.14 4205.86,230 4240,230 4260,250 4260,475.76 4265.86,481.61 U3.9@4352.2,481.61
TP63: TP5.6 U3.10 | length 673.2
  Top Layer w10: U3.10@4352.2,456.02 4449.14,456.02 4455,450.17 4455,280.86 4460.86,275 4693.54,275 4700,268.54 TP5.6@4700,120
TP64: TP6.10 U3.2 | length 882.9
  Top Layer w10: TP6.10@3950,120 4120,120 4140,140 4140,385 v1(4185,430) ; v1(4250,660) 4250.37,660.37 4351.83,660.37 U3.2@4352.2,660.75
  Bottom Layer w10: v1(4185,430) 4270,515 4270,629.18 4250,649.18 v1(4250,660)
TP65: TP6.8 U3.3 | length 1355.1
  Top Layer w10: U3.3@4352.2,635.16 4356.06,639.02 4429.02,639.02 4440,650 v1(4440,700)
  Bottom Layer w10: TP6.8@3750,120 3840,210 3950,210 4005,265 4172.07,265 4197.07,240 4364.14,240 4370,245.86 4370,690 4380,700 v1(4440,700)
TP66: TP5.2 U3.13 | length 322.2
  Top Layer w10: TP5.2@4300,120 4300,240 4290,250 4290,373.39 4295.86,379.25 U3.13@4352.2,379.25
TP69: TP5.9 U3.27 | length 1229.4
  Top Layer w10: U3.27@4627.8,660.75 4720.75,660.75 4730,670 v1(4730,730)
  Bottom Layer w10: v1(4730,730) 4760,760 4850,760 4865,745 4865,475.86 4870.86,470 5074.14,470 5080,464.14 5080,190 5005.86,190 5000,184.14 TP5.9@5000,120
TP70: TP5.10 U3.28 | length 1260.2
  Top Layer w10: U3.28@4627.8,686.34 4674.14,686.34 4680,692.2 4680,810 v1(4730,810)
  Bottom Layer w10: v1(4730,810) 4860,810 4881.21,788.79 4881.21,490.86 4887.07,485 5089.14,485 5100,474.14 TP5.10@5100,120
TP71: IC1.25 TP1.1 | length 1069.1
  Top Layer w10: IC1.25@4540.24,3466.85 4644.14,3466.85 4650,3460.99 4650,3431.09 4655.86,3425.24 4844.76,3425.24 4870,3400 4870,2720 TP1.1@4860,2710
TP72: IC1.24 TP1.2 | length 1040.3
  Top Layer w10: IC1.24@4596.85,3410.24 4838.55,3410.24 4855,3393.79 4855,2795.86 4849.14,2790 4760,2790 TP1.2@4760,2710
TP73: IC1.23 TP1.3 | length 1078.4
  Top Layer w10: IC1.23@4596.85,3378.74 4828.74,3378.74 4840,3367.48 4840,2815.86 4834.14,2810 4665.86,2810 4660,2804.14 TP1.3@4660,2710
TP75: IC1.22 TP1.4 | length 1116.4
  Top Layer w10: TP1.4@4560,2710 4560,2819.14 4565.86,2825 4819.14,2825 4825,2830.86 4825,3335 4812.76,3347.24 IC1.22@4596.85,3347.24
TP76: IC1.21 TP1.5 | length 1153.9
  Top Layer w10: TP1.5@4460,2710 4460,2834.14 4465.86,2840 4804.14,2840 4810,2845.86 4810,3301.72 4795.86,3315.86 4795.75,3315.75 IC1.21@4596.85,3315.75
TP77: IC1.20 TP1.6 | length 1179.5
  Top Layer w10: TP1.6@4360,2710 4360,2784.14 4365.86,2790 4424.14,2790 4430,2795.86 4430,2849.14 4435.86,2855 4784.14,2855 4795,2865.86 4795,3265 4780,3280 4601.1,3280 IC1.20@4596.85,3284.25
TP78: IC1.17 TP1.7 | length 799.5
  Top Layer w10: TP1.7@4260,2710 4260,2804.14 4265.86,2810 4403.28,2810 4410,2816.72 4410,2864.14 4415.86,2870 4585.99,2870 4596.85,2880.86 IC1.17@4596.85,3189.76
TP79: IC1.16 TP1.8 | length 776.9
  Top Layer w10: TP1.8@4160,2710 4160,2804.14 4180.86,2825 4387.43,2825 4395,2832.57 4395,2879.14 4400.86,2885 4529.38,2885 4540.24,2895.86 IC1.16@4540.24,3133.15
TP80: IC1.15 TP1.9 | length 833.7
  Top Layer w10: TP1.9@4060,2710 4060,2799.14 4100.86,2840 4372.43,2840 4380,2847.57 4380,2894.14 4385.86,2900 4497.88,2900 4508.74,2910.86 IC1.15@4508.74,3133.15
TP81: IC1.14 TP1.10 | length 919.8
  Top Layer w10: TP1.10@3960,2710 3960,2780 4010,2780 4010,2844.14 4020.86,2855 4357.43,2855 4365,2862.57 4365,2909.14 4370.86,2915 4466.39,2915 4477.24,2925.86 IC1.14@4477.24,3133.15
TP82: TP2.2 U2.5 | length 408.4
  Top Layer w10: TP2.2@2370,2510 2370,2584.14 2364.14,2590 2335.86,2590 2330,2595.86 2330,2778.55 2335.86,2784.41 U2.5@2434.33,2784.41
TP83: TP2.5 U2.9 | length 383.9
  Top Layer w10: U2.9@2665.67,2758.82 2734.14,2758.82 2740,2752.96 2740,2610 2730,2600 2670,2600 TP2.5@2670,2510
TP84: TP2.7 U2.11 | length 498.5
  Top Layer w10: U2.11@2665.67,2810 2860,2810 2870,2800 TP2.7@2870,2510
TP85: TP2.9 U2.13 | length 743.1
  Top Layer w10: U2.13@2665.67,2861.18 3048.82,2861.18 3070,2840 TP2.9@3070,2510
TP86: TP2.3 U2.6 | length 416.9
  Top Layer w10: U2.6@2434.33,2758.82 2364.68,2758.82 2358.82,2752.96 2358.82,2635.86 2364.68,2630 2450,2630 2470,2610 TP2.3@2470,2510
TP87: TP2.4 U2.8 | length 298
  Top Layer w10: TP2.4@2570,2510 2570,2640 2580,2650 2640,2650 2665.67,2675.67 U2.8@2665.67,2733.23
TP88: TP2.6 U2.10 | length 375.3
  Top Layer w10: U2.10@2665.67,2784.41 2764.14,2784.41 2770,2778.55 TP2.6@2770,2510
TP89: TP2.8 U2.12 | length 621
  Top Layer w10: U2.12@2665.67,2835.59 2921.79,2835.59 2922.06,2835.86 2954.14,2835.86 2970,2820 TP2.8@2970,2510
TP90: IC3.22 TP4.4 | length 136.7
  Top Layer w10: IC3.22@4436.85,1107.24 4487.24,1107.24 4515.47,1135.47 4555.47,1135.47 TP4.4@4560,1140
TXD: IC3.6 R36.1 | length 867.5
  Top Layer w10: IC3.6@4103.15,1012.76 3915.86,1012.76 3910,1006.9 3910,585.86 3915.86,580 R36.1@4158.5,580
UPDI_K_M: IC1.27 P1.2 | length 335
  Top Layer w10: IC1.27@4477.24,3466.85 4477.24,3567.24 4490,3580 4634.14,3580 4640,3585.86 P1.2@4640,3650
UPDI_SD: IC2.27 P2.2 | length 271
  Top Layer w10: IC2.27@4034.49,2123.7 4034.49,2244.49 4070,2280 P2.2@4070,2380
UPDI_USB: IC3.27 P3.2 | length 612
  Top Layer w10: IC3.27@4320,1229.61 IC3.27@4317.24,1226.85 4317.24,1297.24 4400,1380 4750,1380 P3.2@4800,1330
UPDI_WiFi: IC4.27 P4.2 | length 186.7
  Top Layer w10: IC4.27@1717.24,1986.85 1720,1989.61 1720,2127.03 1750,2157.03 P4.2@1750,2160
USB_CPU_CS: H3.9 IC3.13 LED8.1 | length 8668.4
  Top Layer w10: H3.9@300,1600 245.86,1600 240,1594.14 240,861.21 311.21,790 1540,790 1540,854.14 1545.86,860 v1(1620,860) ; v1(1860,860) 1860,750 1900,710 3764.18,710 3779.18,695 v1(3790,695) ; v1(2085,2170) v1(2085,2370) ; v1(2680,3130) LED8.1@2680,3368.5 ; v1(4280,780) 4282.87,782.87 4282.87,890.28 IC3.13@4285.75,893.15
  Bottom Layer w10: v1(1620,860) v1(1860,860) 1860,1180 1820,1220 1820,1540 1883.79,1603.79 2054.14,1603.79 2060,1609.64 2060,2080 2079.14,2080 2085,2085.86 v1(2085,2170) ; v1@2090,2368.62 2090,2484.14 2095.86,2490 2134.14,2490 2140,2495.86 2140,3014.14 2145.86,3020 2670,3020 2680,3030 v1(2680,3130) ; v1(3790,695) 3895,695 3960,630 4104.14,630 4110,635.86 4110,770 4120,780 v1(4280,780)
USB_CPU_nInt: H3.5 IC3.11 LED2.1 | length 8250.2
  Top Layer w10: H3.5@300,1800 235.86,1800 225,1789.14 225,855 305,775 1625,775 v1(1630,780) ; v1(1950,790) 1999.64,790 2059.64,730 3740,730 3740,770 3750,780 v1(3790,780) ; v1@2160,2190 v1@2160,2390 ; v1@2185,2630 2185,3273.5 LED2.1@2280,3368.5 ; v1(4090,820) 4216.9,820 4222.76,825.86 IC3.11@4222.76,893.15
  Bottom Layer w10: v1(1630,780) 1635,785 1945,785 v1(1950,790) 1950,850 1980,880 1980,1560 1990,1570 2064.14,1570 2075,1580.86 2075,2060 2144.14,2060 2150,2065.86 2150,2144.14 2152.35,2146.49 2152.35,2167.73 v1@2150,2170.08 ; v1(2160,2370) 2190,2400 v1(2190,2630) v1@2184.14,2624.14 ; v1(3790,780) 3797.65,772.35 3827.65,772.35 3840,760 3840,715.86 3845.86,710 3910,710 3975,645 4084.14,645 4090,650.86 v1(4090,820)
  other v1: 2160,2170
USBDM: J6.2 R38.1 | length 380.7
  Top Layer w10: R38.1@5026.38,835.12 R38.1@5021.5,840 5154.14,840 5160,834.14 5160,748.28 5173.17,735.12 J6.2@5301.57,735.12
USBDP: J6.3 R39.1 | length 404.2
  Top Layer w10: R39.1@5021.5,900 5170,900 5180,890 5180,772.47 5185.86,766.61 J6.3@5301.57,766.61
WiFi_CPU_CS: H4.9 IC4.13 LED7.1 | length 4012
  Top Layer w10: IC4.13@1685.75,1653.15 1685.75,1544.25 1710,1520 v1(1710,1430) ; v1(2005,2170) 2007.5,2172.5 2007.5,2367.5 v1(2005,2370) ; v1@2110,2580 2110,3360 LED7.1@2120,3370
  Bottom Layer w10: H4.9@800,1600 850,1550 959.14,1550 965,1544.14 965,1435 1025,1375 1025,1220.86 1030.86,1215 1704.14,1215 1710,1220.86 v1(1710,1430) 1710,1560 1800,1650 2004.14,1650 2010,1655.86 2010,1791.72 1960,1841.72 1960,2151.36 1970.99,2162.35 1997.35,2162.35 v1(2005,2170) ; v1(2005,2370) 2010,2375 2010,2574.14 2015.86,2580 v1@2110,2580
  other v1: 2100,2580
WiFi_CPU_nInt: H4.5 IC4.11 LED1.1 | length 4417
  Top Layer w10: v1(1590,1520) 1622.76,1552.76 1622.76,1640 IC4.11@1621.38,1641.38 ; LED1.1@2000,3368.5 2000,3105.86 2002.35,3103.51 v1(2002.35,3087.65)
  Bottom Layer w10: v1(1590,1520) 1590,1250.86 1584.14,1245 1060.86,1245 1055,1250.86 1055,1387.43 1000,1442.43 1000,1744.14 994.14,1750 820,1750 809.57,1760.43 809.57,1790.43 H4.5@800,1800 850,1850 1024.14,1850 1030,1855.86 1030,2330 1070,2370 1070,3087.65 v1(2002.35,3087.65)
WiFi_CS: IC4.17 WiFi1.80 | length 1231.6
  Top Layer w10: IC4.17@1836.85,1709.76 1836.85,1586.85 1810,1560 1810,615.86 1815.86,610 1899.14,610 1899.58,610.43 1920.43,610.43 WiFi1.80@1930,620
WiFi_MISO: IC4.15 WiFi1.78 | length 1525.8
  Top Layer w10: IC4.15@1748.74,1653.15 1748.74,1541.26 1780,1510 1780,555.86 1785.86,550 2118.28,550 2124.14,555.86 2124.14,614.14 WiFi1.78@2130,620
WiFi_MOSI: IC4.14 WiFi1.77 | length 1669.6
  Top Layer w10: IC4.14@1717.24,1653.15 1717.24,1542.76 1765,1495 1765,549.64 1779.64,535 2213.28,535 2224.14,545.86 2224.14,614.14 WiFi1.77@2230,620
WiFi_PC0: IC4.6 WiFi1.73 | length 3207.2
  Top Layer w10: IC4.6@1503.15,1772.76 1420.86,1772.76 1415,1766.9 1415,1375 1475,1315 1689.14,1315 1695,1309.14 1695,295 1765,225 2635,225 2680,270 2680,570 WiFi1.73@2630,620
WiFi_PC1: IC4.7 WiFi1.74 | length 3017.2
  Top Layer w10: IC4.7@1503.15,1741.26 1501.89,1740 1440,1740 1430,1730 1430,1390 1490,1330 1704.14,1330 1710,1324.14 1710,301.21 1771.21,240 2534.14,240 2580,285.86 2580,570 WiFi1.74@2530,620
WiFi_PC2: IC4.8 WiFi1.75 | length 2788.6
  Top Layer w10: IC4.8@1495,1704.76 1490,1709.76 IC4.8@1503.15,1709.76 1503.15,1356.85 1510,1350 1724.14,1350 1730,1344.14 1730,305 1780,255 2459.14,255 2480,275.86 2480,570 WiFi1.75@2430,620
WiFi_PC3: IC4.9 WiFi1.76 | length 2051.6
  Top Layer w10: IC4.9@1559.76,1653.15 1525.86,1653.15 1520,1647.29 1520,1400 1550,1370 1750,1370 1750,525.86 1755.86,520 2318.28,520 2324.14,525.86 2324.14,614.14 WiFi1.76@2330,620
WiFi_PF1: IC4.21 WiFi1.67 | length 2455.1
  Top Layer w10: IC4.21@1836.85,1835.75 1842.6,1830 2169.18,1830 2299.18,1700 v1(2310,1700)
  Bottom Layer w10: v1(2310,1700) 2302.35,1692.35 2302.35,1663.2 2300,1660.86 2300,1645.86 2305.86,1640 3085,1640 3180,1545 3180,840 3230,790 WiFi1.67@3230,620
WiFi_PF2: IC4.22 WiFi1.68 | length 2655.9
  Top Layer w10: IC4.22@1836.85,1867.24 2252.76,1867.24 v1(2320,1800)
  Bottom Layer w10: v1(2320,1800) 2230,1800 2220,1790 2220,1635.86 2230.86,1625 3073.79,1625 3080,1618.79 3080,840 3130,790 WiFi1.68@3130,620
WiFi_PF3: IC4.23 WiFi1.69 | length 2663.1
  Top Layer w10: IC4.23@1836.85,1898.74 1837.48,1899.37 2319.37,1899.37 v1(2320,1900)
  Bottom Layer w10: v1(2320,1900) 2205.86,1900 2200,1894.14 2200,1634.64 2224.64,1610 2974.14,1610 2980,1604.14 2980,890 3030,840 WiFi1.69@3030,620
WiFi_PF4: IC4.24 WiFi1.70 | length 2458
  Top Layer w10: IC4.24@1836.85,1930.24 2159.41,1930.24 2189.18,1960 v1(2230,1960)
  Bottom Layer w10: v1(2230,1960) 2180,1910 2180,1633.43 2218.43,1595 2869.14,1595 2880,1584.14 2880,830 2930,780 WiFi1.70@2930,620
WiFi_PF5: IC4.25 WiFi1.71 | length 2375.6
  Top Layer w10: IC4.25@1780.24,1986.85 1783.9,1986.85 1787.05,1990 2109.18,1990 2129.18,2010 v1(2140,2010)
  Bottom Layer w10: v1(2140,2010) 2140,1868.26 2160,1848.26 2160,1630 2210,1580 2774.14,1580 2780,1574.14 2780,850 2830,800 WiFi1.71@2830,620
WiFi_Rst: IC4.20 WiFi1.72 | length 1992.4
  Top Layer w10: IC4.20@1836.85,1804.25 1838.98,1802.13 2107.87,1802.13 2120,1790 v1(2120,1720)
  Bottom Layer w10: v1(2120,1720) 2120,1640 2195,1565 2674.14,1565 2680,1559.14 2680,840 2730,790 WiFi1.72@2730,620
WiFi_SCK: IC4.16 WiFi1.79 | length 1364
  Top Layer w10: IC4.16@1780.24,1653.15 1780.24,1539.76 1795,1525 1795,575.86 1800.86,570 2018.28,570 2024.14,575.86 2024.14,614.14 WiFi1.79@2030,620
pads on no net: B1.3 B1.6 B1.9 B1.12 B2.6 B2.9 J3.H1 J3.H2 J6.10 J6.11 U3.8 U3.24

## Polygon pours and split planes (outlines as drawn)
GND on Plane_Gnd (split plane): 5579.9,20.1 20.1,20.1 20.1,3979.9 5579.9,3979.9
+5 on Plane_Power (split plane): 5579.9,20.1 20.1,20.1 20.1,3979.9 5579.9,3979.9

## Silkscreen, mask and mechanical layers (free items; w line width, h text height)
Top Overlay:
  drawing of 251 lines, arcs and shapes, not listed
  text "ABS Data Systems, Inc, (c) Copyright 2025" at 1800,3903.33 h40
  text "CPU Bus and Control" at 2170,3760 h40
  text "Power" at 3800,3750 h40
  text "K/M" at 4670,3720 h40
  text "WiFI" at 1970,3640 h40
  text "USB" at 2250,3640 h40
  text "SD" at 2520,3640 h40
  text "K/M" at 2810,3640 h40
  text "Reset" at 3080,3600 h40
  text "3.3V" at 3725,3591.5 h40
  text "5V" at 3985.78,3591.5 h40
  text "D7" at 1125,3590 h40
  text "D6" at 1225,3590 h40
  text "D5" at 1325,3590 h40
  text "D4" at 1425,3590 h40
  text "D3" at 1525,3590 h40
  text "D2" at 1625,3590 h40
  text "D1" at 1725,3590 h40
  text "D0" at 1825,3590 h40
  text "Int" at 1970,3590 h40
  text "CS" at 2090,3590 h40
  text "Int" at 2250,3590 h40
  text "CS" at 2370,3590 h40
  text "Int" at 2530,3590 h40
  text "CS" at 2650,3590 h40
  text "Int" at 2810,3590 h40
  text "CS" at 2930,3590 h40
  text "RD" at 3370,3590 h40
  text "WR" at 3500,3590 h40
  text "Mouse" at 4910,3170 h40
  text "SD" at 4250,2360 h40
  text "Keyboard" at 4810,2343.33 h40
  text "WiFi" at 1770,2240 h40
  text "Pull Up" at 1850,1710 h60
  text "Pull Down" at 2660,1710 h60
  text "330" at 1870,1610 h40
  text "1K" at 2100,1610 h40
  text "4.7K" at 2270,1610 h40
  text "10K" at 2480,1610 h40
  text "330" at 2660,1610 h40
  text "1K" at 2890,1610 h40
  text "4.7K" at 3060,1610 h40
  text "10K" at 3270,1610 h40
  text "USB" at 4480,1420 h40
  text "Gnd" at 3420,1330 h60
  text "IO Combo Board V1.2" at 400,890 h60
  text "CS" at 1890,740 h30
  text "MISO" at 2070,740 h30
  text "PC3" at 2290,740 h30
  text "PC1" at 2490,740 h30
  text "RST" at 2700,740 h30
  text "PF4" at 2890,740 h30
  text "PF2" at 3080,740 h30
  text "3.3V" at 3330,740 h30
  text "5V" at 3590,740 h30
  text "SCK" at 1990,690 h30
  text "MOSI" at 2190,690 h30
  text "PC2" at 2380,690 h30
  text "PC0" at 2590,690 h30
  text "PF5" at 2790,690 h30
  text "PF3" at 2990,690 h30
  text "PF1" at 3190,690 h30
Mechanical 1:
  the board outline again, w10

## Text inside footprints (layer, text, board x,y; h text height)
J4: Top Overlay "1" at 4900,300 h50; Top Overlay "2" at 4900,400 h50
J5: Top Overlay "1" at 5080,300 h50; Top Overlay "2" at 5080,400 h50
TP1: Top Overlay "1" at 4860,2780 h30
TP2: Top Overlay "1" at 2260,2390 h30
TP3: Top Overlay "1" at 3950,2590 h30
TP4: Top Overlay "1" at 4580,760 h30 r90
TP5: Top Overlay "1" at 4100,170 h30
TP6: Top Overlay "1" at 2950,130 h30
TP7: Top Overlay "1" at 4680,810 h30 r90